# EAGLE board BFA_board (EAGLE 7.6.0)
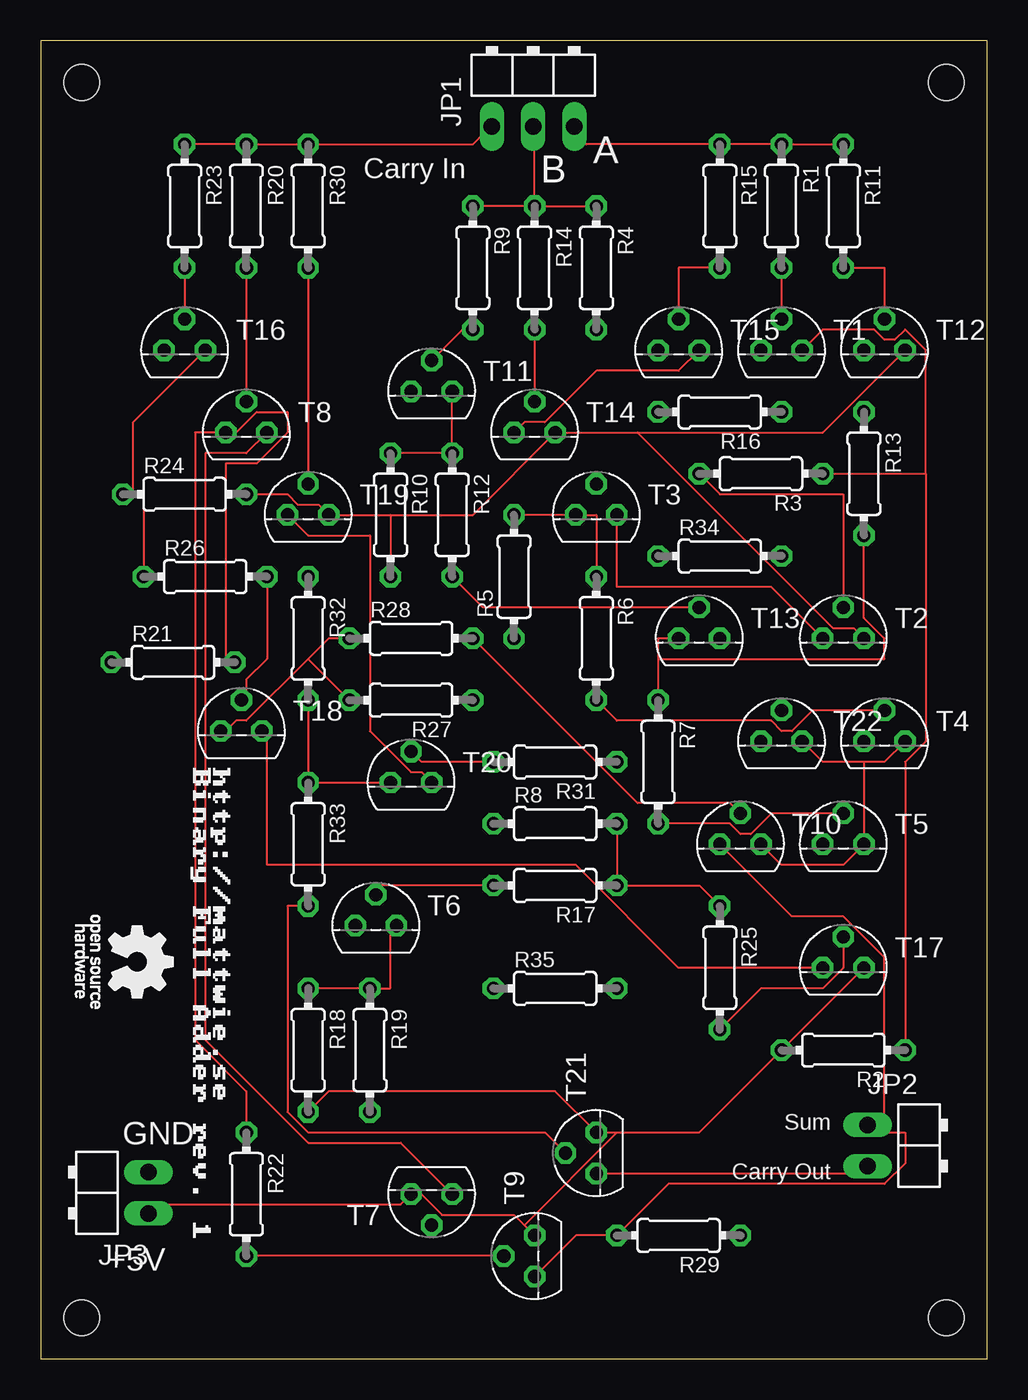
[diagram p0: board, top side]
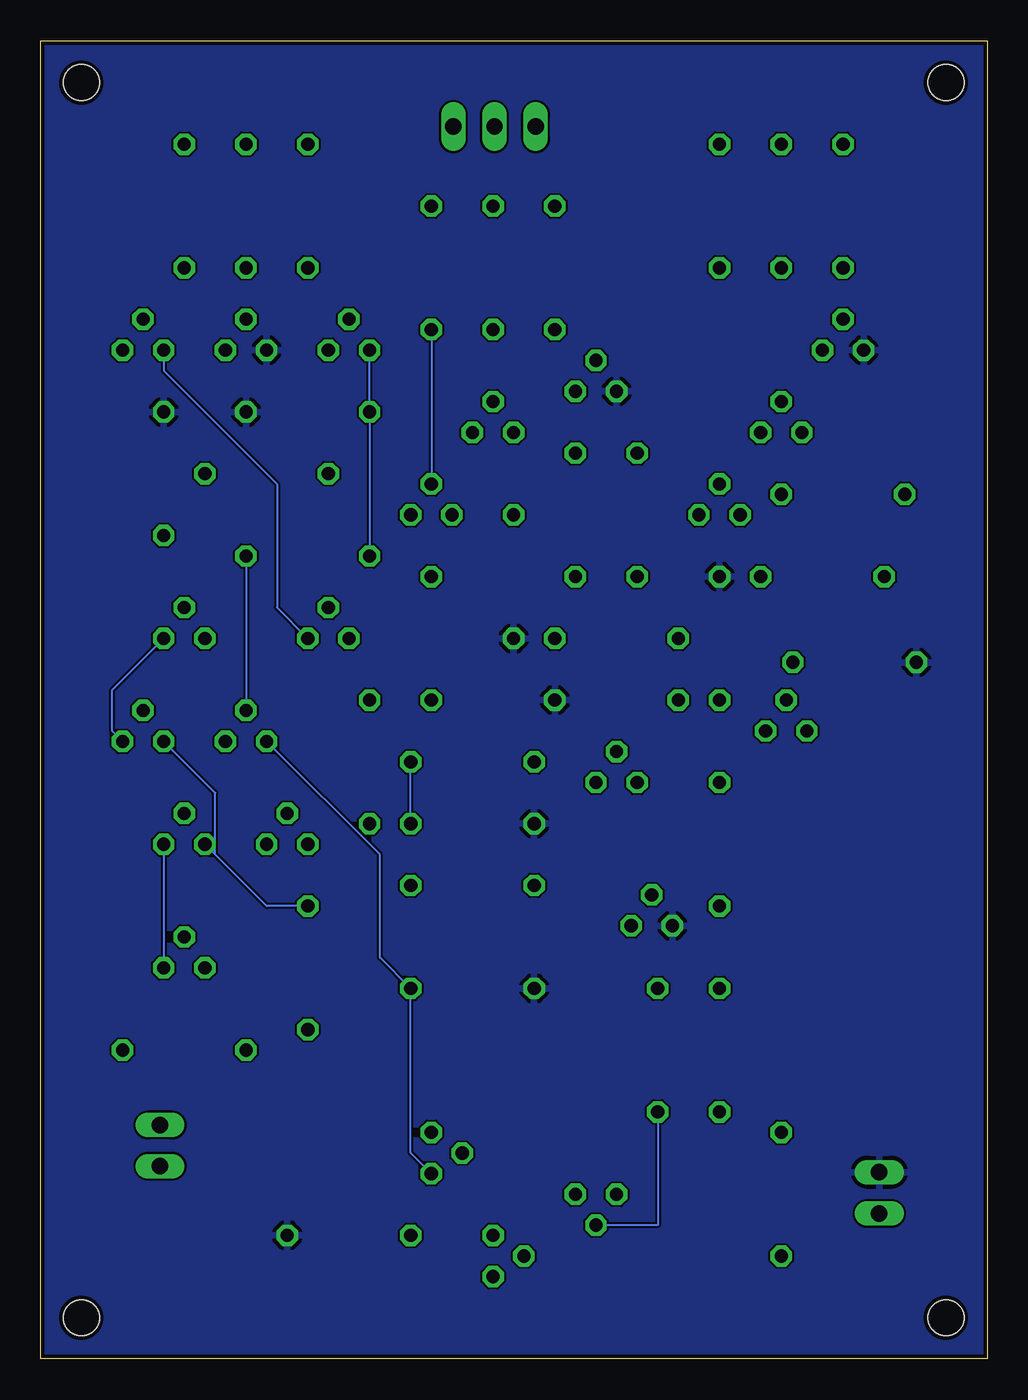
[diagram p1: board, bottom side, seen from below]

Size 58.4 x 81.33 mm. Coordinates in mm from the lower left corner, seen from the top.
Outline: 58.4,0 0,0 0,81.33 58.4,81.33
Outline: 58.4,0 58.4,81.33
Copper layers (1*16): Top 0.035mm / dielectric 1.5mm / Bottom 0.035mm
Design rules "dirt_cheap_dirty_boards.v1": minimum track width 5mil, minimum drill 12mil, track to track 5mil, track to pad 5mil, pad to pad 5mil, via to via 5mil, smd to smd 0mil, copper to edge 10mil, drill to drill 10mil, minimum pad ring 10mil, minimum via ring 6mil, stop-mask expansion 2mil, vias tented up to drill 25mil, thermal gap 10mil
Holes 2.2 mm at 2.54,2.54 55.88,2.54 55.88,78.74 2.54,78.74

## Footprints (pad centres in the part's own frame; a part is rotated, then mirrored left to right if it is on the bottom)
1X03/90 = drill 1.016 long: 1 -2.54,-3.81; 2 0,-3.81; 3 2.54,-3.81
1X02/90 = drill 1.016 long: 1 -1.27,-3.81; 2 1.27,-3.81
0204/7 = drill 0.813 octagon: 1 -3.81,0; 2 3.81,0
TO92 = drill 0.813 octagon: 1 1.27,0; 2 0,1.905; 3 -1.27,0

## Placement (x,y rotation side)
JP1  [1X03/90]  30.39,79.83 0 top
JP2  [1X02/90]  54.84,13.17 270 top
JP3  [1X02/90]  2.84,10.25 90 top
R1  10K  [0204/7]  45.72,71.12 270 top
R2  1K  [0204/7]  49.53,19.05 180 top
R3  10K  [0204/7]  44.45,54.61 180 top
R4  10K  [0204/7]  34.29,67.31 270 top
R5  1K  [0204/7]  29.21,48.26 90 top
R6  10K  [0204/7]  34.29,44.45 270 top
R7  10K  [0204/7]  38.1,36.83 270 top
R8  1K  [0204/7]  31.75,33.02 0 top
R9  10K  [0204/7]  26.67,67.31 270 top
R10  1K  [0204/7]  21.59,52.07 270 top
R11  10K  [0204/7]  49.53,71.12 270 top
R12  10K  [0204/7]  25.4,52.07 270 top
R13  1K  [0204/7]  50.8,54.61 270 top
R14  10K  [0204/7]  30.48,67.31 270 top
R15  10K  [0204/7]  41.91,71.12 270 top
R16  1K  [0204/7]  41.91,58.42 180 top
R17  10K  [0204/7]  31.75,29.21 180 top
R18  1K  [0204/7]  16.51,19.05 270 top
R19  10K  [0204/7]  20.32,19.05 270 top
R20  10K  [0204/7]  12.7,71.12 270 top
R21  1K  [0204/7]  8.17,42.98 0 top
R22  10K  [0204/7]  12.7,10.16 270 top
R23  10K  [0204/7]  8.89,71.12 270 top
R24  1K  [0204/7]  8.89,53.34 0 top
R25  10K  [0204/7]  41.91,24.13 270 top
R26  10K  [0204/7]  10.16,48.26 0 top
R27  1K  [0204/7]  22.86,40.64 180 top
R28  10K  [0204/7]  22.86,44.45 0 top
R29  1K  [0204/7]  39.37,7.62 180 top
R30  10K  [0204/7]  16.51,71.12 270 top
R31  10K  [0204/7]  31.75,36.83 180 top
R32  1K  [0204/7]  16.51,44.45 270 top
R33  10K  [0204/7]  16.51,31.75 270 top
R34  10K  [0204/7]  41.91,49.53 0 top
R35  1K  [0204/7]  31.75,22.86 0 top
T1  2N3904  [TO92]  45.72,62.23 0 top
T2  2N3904  [TO92]  49.53,44.45 0 top
T3  2N3904  [TO92]  34.29,52.07 0 top
T4  2N3904  [TO92]  52.07,38.1 0 top
T5  2N3904  [TO92]  49.53,31.75 0 top
T6  2N3904  [TO92]  20.69,26.73 0 top
T7  2N3904  [TO92]  24.13,10.16 180 top
T8  2N3904  [TO92]  12.7,57.15 0 top
T9  2N3904  [TO92]  30.48,6.35 90 top
T10  2N3904  [TO92]  43.18,31.75 0 top
T11  2N3904  [TO92]  24.13,59.69 0 top
T12  2N3904  [TO92]  52.07,62.23 0 top
T13  2N3904  [TO92]  40.64,44.45 0 top
T14  2N3904  [TO92]  30.48,57.15 0 top
T15  2N3904  [TO92]  39.37,62.23 0 top
T16  2N3904  [TO92]  8.89,62.23 0 top
T17  2N3904  [TO92]  49.53,24.13 0 top
T18  2N3904  [TO92]  12.39,38.74 0 top
T19  2N3904  [TO92]  16.51,52.07 0 top
T20  2N3904  [TO92]  22.86,35.56 0 top
T21  2N3904  [TO92]  34.29,12.7 90 top
T22  2N3904  [TO92]  45.72,38.1 0 top

## Library data of the parts
JP1-JP3 = pinhead
R1-R35 = resistor
T1-T22 = transistor

## Nets
+5V: JP3.1 R2.2 R10.2 R18.2 R24.2 T2.1 T4.1 T5.1 T7.1 T9.1 T10.1 T12.1 T14.1 T17.1 T19.1 T21.1 T22.1
GND: JP3.2 R5.1 R8.1 R13.1 R16.1 R21.1 R27.1 R29.1 R32.1 R35.1 T1.3 T6.3 T11.3 T16.3
N$1: T14.3 T15.1
N$2: R9.2 T11.2
N$3: R10.1 R12.1 T11.1
N$4: R5.2 R6.1 T3.3
N$5: T2.3 T3.1
N$6: R2.1 R3.1 T1.1
N$7: R19.2 T7.2
N$8: T19.3 T20.1
N$9: R32.2 R33.1 T20.3
N$10: JP2.2 R35.2 T21.3 T22.3
N$11: R27.2 R28.1 T18.3
N$12: T17.3 T18.1
N$13: JP2.1 R29.2 T9.3 T10.3
N$14: R21.2 R22.1 T8.3
N$15: T7.3 T8.1
N$16: R16.2 R34.1 T15.3
N$17: T12.3 T13.1
N$18: R18.1 R19.1 T6.1
N$19: R24.1 R26.1 T16.1
N$20: R7.2 T5.2
N$21: R1.2 T1.2
N$22: JP1.2 R4.1 R9.1 R14.1
N$23: R3.2 T2.2
N$24: R4.2 T3.2
N$25: R6.2 T4.2
N$26: JP1.3 R1.1 R11.1 R15.1
N$27: R11.2 T12.2
N$28: R7.1 R13.2 T13.3
N$29: R8.2 R17.1 R25.1 R31.1 T4.3 T5.3
N$30: R25.2 T17.2
N$31: R26.2 T18.2
N$32: R17.2 T6.2
N$33: R15.2 T15.2
N$34: R12.2 T13.2
N$35: R14.2 T14.2
N$36: JP1.1 R20.1 R23.1 R30.1
N$37: R30.2 T19.2
N$38: R31.2 T20.2
N$39: R20.2 T8.2
N$40: R34.2 T22.2
N$41: R23.2 T16.2
N$42: R33.2 T21.2
N$44: R22.2 T9.2
N$45: R28.2 T10.2

## Tracks (layer width: path | path; a pad name or v marks a point on that pad's centre or on a via)
+5V
  Top 0.127: JP3.1 6.98,9.53 22.22,9.53 T7.1 23.49,10.16 24.77,8.89 29.21,8.89 29.84,8.26 | 29.84,8.26 T9.1 | T17.1 R2.2 40.64,13.97 35.56,13.97 | R18.2 17.78,16.51 31.75,16.51 T21.1 35.56,13.97 | 35.56,13.97 29.84,8.26 | T10.1 45.72,30.48 49.53,30.48 T5.1 50.8,36.83 | T22.1 48.26,36.83 50.8,36.83 | 50.8,36.83 52.07,36.83 T4.1 | R24.2 15.24,53.34 15.88,52.71 17.14,52.71 T19.1 21.59,52.07 | 21.59,52.07 R10.2 | 21.59,52.07 26.67,52.07 T14.1 36.83,57.15 | T12.1 48.26,57.15 36.83,57.15 | T2.1 50.16,45.09 48.89,45.09 36.83,57.15
  Bottom 0.127: T2.1 53.97,41.28 53.97,38.74 T4.1 | T5.1 T17.1
GND
  pour Bottom: -0.71,82.65 59.75,82.55 59.8,-1.28 -1.5,-0.91
N$1
  Top 0.127: T14.3 29.84,57.79 31.11,57.79 34.29,60.96 39.37,60.96 T15.1
N$2
  Top 0.127: T11.2 26.03,63.5 R9.2
N$3
  Top 0.127: R10.1 R12.1 T11.1
N$4
  Top 0.127: R5.2 T3.3 34.29,52.07 R6.1
N$5
  Top 0.127: T3.1 35.56,47.63 45.09,47.63 T2.3
N$6
  Top 0.127: R2.1 53.34,36.83 54.61,38.1 54.61,54.61 | R3.1 54.61,54.61 | T1.1 48.26,63.5 51.44,63.5 52.07,62.87 52.7,62.87 53.34,63.5 54.61,62.23 54.61,54.61
N$7
  Bottom 0.127: T7.2 20.32,8.26 R19.2
N$8
  Top 0.127: T20.1 23.49,36.2 22.86,36.2 20.32,38.74 20.32,50.8 16.51,50.8 T19.3
N$9
  Top 0.127: R32.2 R33.1 T20.3
N$10
  Top 0.127: T21.3 50.8,11.43 JP2.2
  Bottom 0.127: T21.3 35.56,12.7 R35.2 37.46,24.77 37.46,31.12 T22.3
N$11
  Top 0.127: 16.51,43.18 17.78,44.45 R28.1 | 16.51,43.18 12.7,39.37 12.06,39.37 11.43,38.74 T18.3 | 16.51,43.18 R27.2
N$12
  Top 0.127: T17.3 39.37,24.13 33.02,30.48 13.97,30.48 13.97,38.74 T18.1
N$13
  Top 0.127: T9.3 33.02,7.62 R29.2 38.73,10.8 52.07,10.8 53.34,12.07 53.34,13.97 51.44,13.97 JP2.1 51.44,14.61 52.07,14.61 52.07,24.77 49.53,27.31 46.35,27.31 T10.3
N$14
  Top 0.127: R22.1 12.7,16.51 9.52,19.69 9.52,57.15 T8.3 12.06,57.15 13.33,58.42 15.24,58.42 15.24,57.15 13.33,55.25 11.43,55.25 11.43,43.18 R21.2
N$15
  Top 0.127: T7.3 22.22,13.34 16.51,13.34 10.16,19.69 10.16,55.88 12.7,55.88 T8.1
N$16
  Bottom 0.127: R34.1 R16.2 T15.3
N$17
  Bottom 0.127: T13.1 43.81,46.36 43.81,53.98 50.8,60.96 T12.3
N$18
  Top 0.127: R18.1 R19.1 21.59,22.86 21.59,26.67 T6.1
N$19
  Top 0.127: R26.1 6.35,53.34 5.71,53.34 | T16.1 5.71,57.79 5.71,53.34 | 5.71,53.34 R24.1
N$20
  Top 0.127: R7.2 42.54,33.02 43.18,32.39 43.81,32.39 45.09,33.66 T5.2
N$21
  Top 0.127: R1.2 T1.2
N$22
  Top 0.127: R14.1 R9.1 | R14.1 R4.1 | R14.1 30.48,75.57 JP1.2
N$23
  Top 0.127: T2.2 49.53,53.34 41.91,53.34 R3.2
N$24
  Bottom 0.127: R4.2 T3.2
N$25
  Top 0.127: R6.2 35.56,39.37 45.09,39.37 45.72,38.74 46.35,38.74 47.62,40.01 T4.2
N$26
  Top 0.127: R11.1 R1.1 R15.1 33.66,74.93 33.02,75.57 JP1.3
N$27
  Top 0.127: T12.2 52.07,67.31 R11.2
N$28
  Top 0.127: 38.1,43.18 38.1,44.45 T13.3 | 38.1,43.18 R7.1 | R13.2 50.8,45.72 52.07,44.45 52.07,43.18 38.1,43.18
N$29
  Top 0.127: R8.2 R17.1 40.64,29.21 R25.1
  Bottom 0.127: R8.2 R31.1 | 47.62,31.12 44.45,27.94 R25.1 | 47.62,31.12 T5.3 | T4.3 47.62,34.93 47.62,31.12
N$30
  Top 0.127: R25.2 44.45,22.86 48.26,22.86 49.53,24.13 T17.2
N$31
  Top 0.127: R26.2 13.97,43.18 12.7,41.91 12.7,40.64 T18.2
N$32
  Top 0.127: R17.2 20.95,29.21 T6.2
N$33
  Top 0.127: T15.2 39.37,67.31 R15.2
N$34
  Top 0.127: R12.2 27.3,46.36 T13.2
N$35
  Top 0.127: R14.2 T14.2
N$36
  Top 0.127: R23.1 R20.1 R30.1 26.67,74.93 27.3,75.57 JP1.1
N$37
  Top 0.127: R30.2 T19.2
N$38
  Top 0.127: T20.2 23.49,36.83 R31.2
N$39
  Top 0.127: R20.2 T8.2
N$40
  Bottom 0.127: R34.2 T22.2
N$41
  Top 0.127: R23.2 T16.2
N$42
  Top 0.127: T21.2 31.11,13.97 16.51,13.97 15.24,15.24 15.24,27.94 R33.2
N$44
  Top 0.127: T9.2 R22.2
N$45
  Top 0.127: R28.2 36.83,34.29 42.54,34.29 T10.2

## Text on the board
tPlace: A | Carry In | B | C:/Users/JBW/Documents/hardware.bmp | GND | Sum / / Carry Out | +5V